# Altium PCB ALio Arduino ver.PcbDoc (part 2 of 2)
Units mm, origin at the board's own origin, x right, y up, seen from the top; angles counter-clockwise.
Board outline 88.22 x 65.31 mm, 2 copper layers (Top Layer, Bottom Layer); 443 components, 0 nets, 3065 pads, 0 vias.
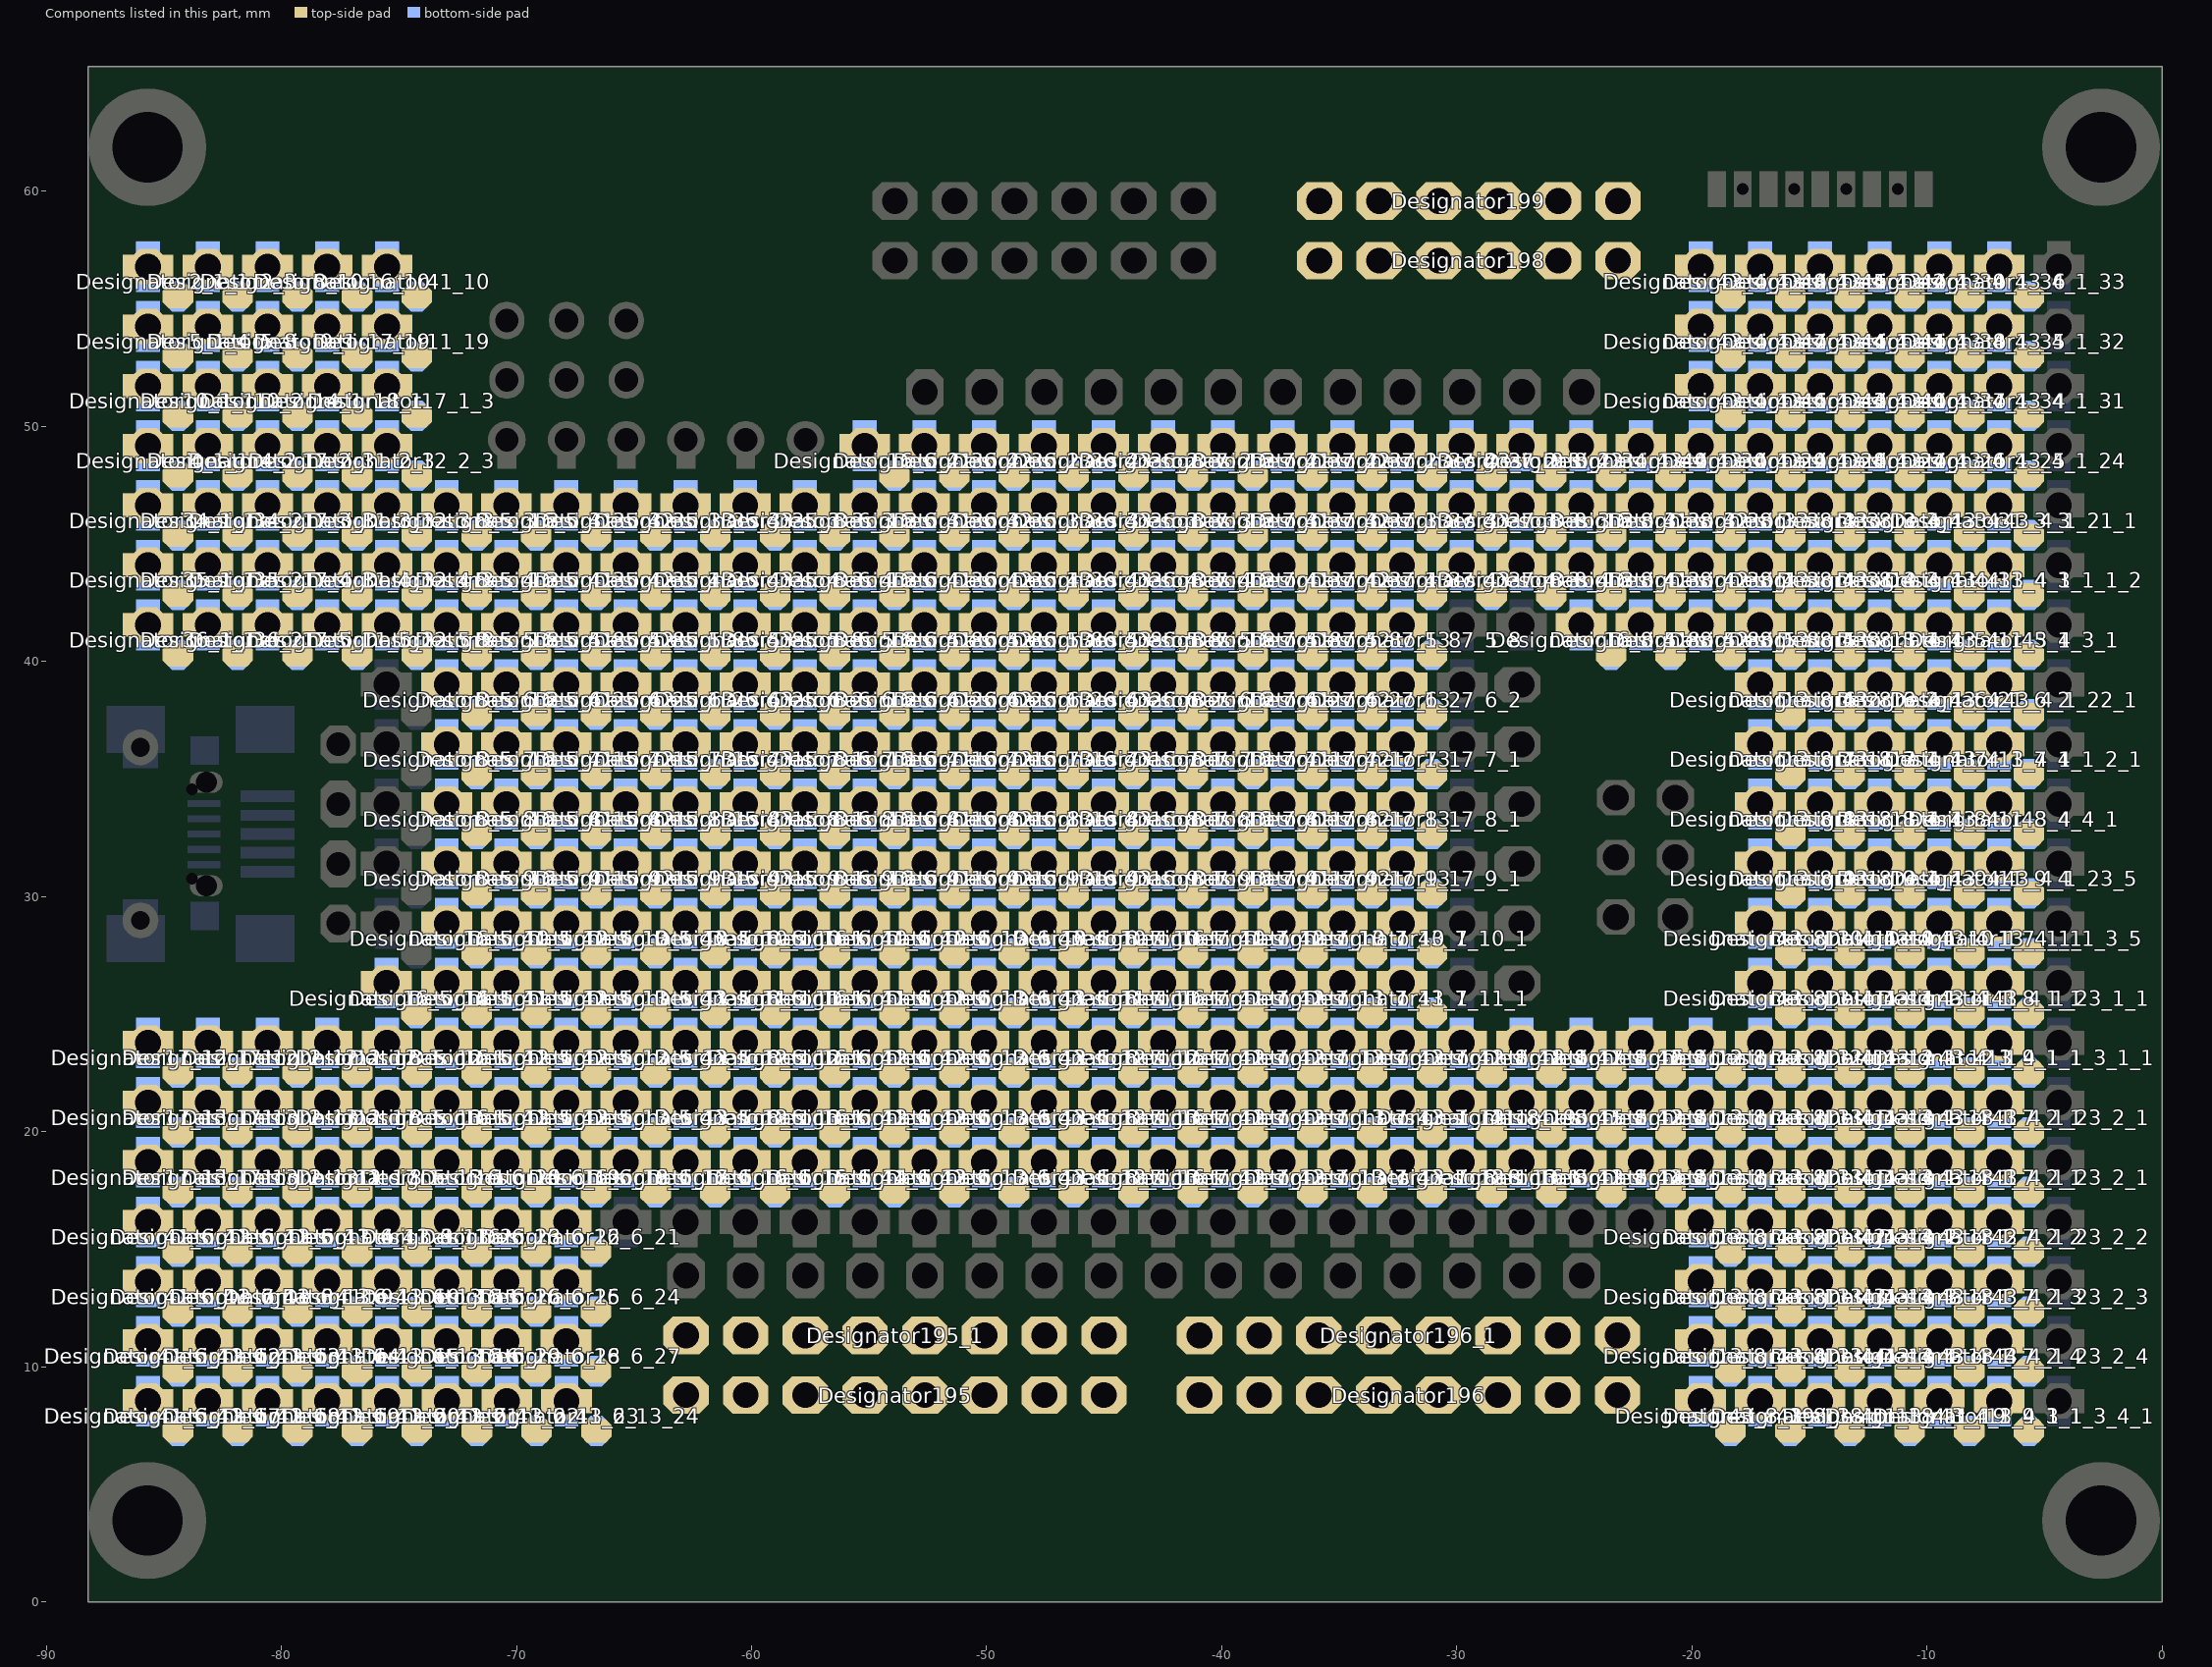
[diagram p2: the components of this part, seen from the top]

## Nets (pads, with @x,y where several pads share a name; then routed paths per layer and width w, separated by ;. In a path a pad name is that pad's centre, name@x,y a point inside that pad or via, vN(x,y) a via of type N, cw(c..) or ccw(c..) an arc to the next point about the centre after c; other vN are vias at no path point)
pads on no net: Designator2_1_1.1 Designator2_1_1.2 Designator2_3.1 Designator2_3.2 Designator4_1_1.1 Designator4_1_1.2 Designator4_2.1 Designator4_2.2 Designator5_1_4.1 Designator5_1_4.2 Designator5_8.1 Designator5_8.2 Designator8_5_3_3.1 Designator8_5_3_3.2 Designator8_5_4_3.1 Designator8_5_4_3.2 Designator8_5_5_8.1 Designator8_5_5_8.2 Designator8_5_6_2.1 Designator8_5_6_2.2 Designator8_5_7_1.1 Designator8_5_7_1.2 Designator8_5_8_1.1 Designator8_5_8_1.2 Designator8_5_9_1.1 Designator8_5_9_1.2 Designator8_5_12_1.1 Designator8_5_12_1.2 Designator8_5_13_1.1 Designator8_5_13_1.2 Designator8_6_3_3.1 Designator8_6_3_3.2 Designator8_6_4_3.1 Designator8_6_4_3.2 Designator8_6_5_8.1 Designator8_6_5_8.2 Designator8_6_6_2.1 Designator8_6_6_2.2 Designator8_6_7_1.1 Designator8_6_7_1.2 Designator8_6_8_1.1 Designator8_6_8_1.2 Designator8_6_9_1.1 Designator8_6_9_1.2 Designator8_6_10_1.1 Designator8_6_10_1.2 Designator8_6_11_1.1 Designator8_6_11_1.2 Designator8_6_12_1.1 Designator8_6_12_1.2 Designator8_6_13_1.1 Designator8_6_13_1.2 Designator8_7_2_3.1 Designator8_7_2_3.2 Designator8_7_3_3.1 Designator8_7_3_3.2 Designator8_7_4_3.1 Designator8_7_4_3.2 Designator8_7_5_8.1 Designator8_7_5_8.2 Designator8_7_6_2.1 Designator8_7_6_2.2 Designator8_7_7_1.1 Designator8_7_7_1.2 Designator8_7_8_1.1 Designator8_7_8_1.2 Designator8_7_9_1.1 Designator8_7_9_1.2 Designator8_7_10_1.1 Designator8_7_10_1.2 Designator8_7_11_1.1 Designator8_7_11_1.2 Designator8_7_12_1.1 Designator8_7_12_1.2 Designator8_7_13_1.1 Designator8_7_13_1.2 Designator8_8_2_3.1 Designator8_8_2_3.2 Designator8_8_3_3.1 Designator8_8_3_3.2 Designator8_8_4_3.1 Designator8_8_4_3.2 Designator8_8_13_1.1 Designator8_8_13_1.2 Designator8_10.1 Designator8_10.2 Designator9_1.1 Designator9_1.2 Designator10_1_1.1 Designator10_1_1.2 Designator10_2.1 Designator10_2.2 Designator11_2_3.1 Designator11_2_3.2 Designator11_3_3.1 Designator11_3_3.2 Designator11_4_3.1 Designator11_4_3.2 Designator11_5_2.1 Designator11_5_2.2 Designator11_12_1.1 Designator11_12_1.2 Designator11_13_1.1 Designator11_13_1.2 Designator11_19.1 Designator11_19.2 Designator12_2_3.1 Designator12_2_3.2 Designator12_3_3.1 Designator12_3_3.2 Designator12_4_3.1 Designator12_4_3.2 Designator12_5_8.1 Designator12_5_8.2 Designator12_12_1.1 Designator12_12_1.2 Designator12_17_1.1 Designator12_17_1.2 Designator13_4_1_1_1_2.1 Designator13_4_1_1_1_2.2 Designator13_4_1_1_2_1.1 Designator13_4_1_1_2_1.2 Designator13_4_1_1_3_1_1.1 Designator13_4_1_1_3_1_1.2 Designator13_4_1_1_3_4_1.1 Designator13_4_1_1_3_4_1.2 Designator13_4_1_1_3_5.1 Designator13_4_1_1_3_5.2 Designator13_4_1_3_3.1 Designator13_4_1_3_3.2 Designator13_4_1_4_3.1 Designator13_4_1_4_3.2 Designator13_4_1_5_1.1 Designator13_4_1_5_1.2 Designator13_4_1_6_2.1 Designator13_4_1_6_2.2 Designator13_4_1_7_1.1 Designator13_4_1_7_1.2 Designator13_4_1_8_1.1 Designator13_4_1_8_1.2 Designator13_4_1_9_1.1 Designator13_4_1_9_1.2 Designator13_4_1_10_1.1 Designator13_4_1_10_1.2 Designator13_4_1_11_1.1 Designator13_4_1_11_1.2 Designator13_4_1_12_1.1 Designator13_4_1_12_1.2 Designator13_4_1_13_1.1 Designator13_4_1_13_1.2 Designator13_4_1_13_2.1 Designator13_4_1_13_2.2 Designator13_4_1_13_3.1 Designator13_4_1_13_3.2 Designator13_4_1_13_4.1 Designator13_4_1_13_4.2 Designator13_4_1_18_1.1 Designator13_4_1_18_1.2 Designator13_4_1_19.1 Designator13_4_1_19.2 Designator13_5_3_3.1 Designator13_5_3_3.2 Designator13_5_4_3.1 Designator13_5_4_3.2 Designator13_5_5_8.1 Designator13_5_5_8.2 Designator13_5_6_2.1 Designator13_5_6_2.2 Designator13_5_7_1.1 Designator13_5_7_1.2 Designator13_5_8_1.1 Designator13_5_8_1.2 Designator13_5_9_1.1 Designator13_5_9_1.2 Designator13_5_10_1.1 Designator13_5_10_1.2 Designator13_5_11_1.1 Designator13_5_11_1.2 Designator13_5_12_1.1 Designator13_5_12_1.2 Designator13_5_13_1.1 Designator13_5_13_1.2 Designator13_6_2_3.1 Designator13_6_2_3.2 Designator13_6_3_3.1 Designator13_6_3_3.2 Designator13_6_4_3.1 Designator13_6_4_3.2 Designator13_6_5_8.1 Designator13_6_5_8.2 Designator13_6_6_2.1 Designator13_6_6_2.2 Designator13_6_7_1.1 Designator13_6_7_1.2 Designator13_6_8_1.1 Designator13_6_8_1.2 Designator13_6_9_1.1 Designator13_6_9_1.2 Designator13_6_10_1.1 Designator13_6_10_1.2 Designator13_6_11_1.1 Designator13_6_11_1.2 Designator13_6_12_1.1 Designator13_6_12_1.2 Designator13_6_13_1.1 Designator13_6_13_1.2 Designator13_7_2_3.1 Designator13_7_2_3.2 Designator13_7_3_3.1 Designator13_7_3_3.2 Designator13_7_4_3.1 Designator13_7_4_3.2 Designator13_7_5_8.1 Designator13_7_5_8.2 Designator13_7_6_2.1 Designator13_7_6_2.2 Designator13_7_7_1.1 Designator13_7_7_1.2 Designator13_7_8_1.1 Designator13_7_8_1.2 Designator13_7_9_1.1 Designator13_7_9_1.2 Designator13_7_10_1.1 Designator13_7_10_1.2 Designator13_7_11_1.1 Designator13_7_11_1.2 Designator13_7_12_1.1 Designator13_7_12_1.2 Designator13_7_13_1.1 Designator13_7_13_1.2 Designator13_8_3_3.1 Designator13_8_3_3.2 Designator13_8_4_3.1 Designator13_8_4_3.2 Designator13_8_5_8.1 Designator13_8_5_8.2 Designator13_8_6_2.1 Designator13_8_6_2.2 Designator13_8_7_1.1 Designator13_8_7_1.2 Designator13_8_8_1.1 Designator13_8_8_1.2 Designator13_8_9_1.1 Designator13_8_9_1.2 Designator13_8_12_1.1 Designator13_8_12_1.2 Designator13_8_13_1.1 Designator13_8_13_1.2 Designator13_8_13_2.1 Designator13_8_13_2.2 Designator13_8_13_3.1 Designator13_8_13_3.2 Designator13_8_13_4.1 Designator13_8_13_4.2 Designator14_1.1 Designator14_1.2 Designator16_5_3_3.1 Designator16_5_3_3.2 Designator16_5_4_3.1 Designator16_5_4_3.2 Designator16_5_5_8.1 Designator16_5_5_8.2 Designator16_5_6_2.1 Designator16_5_6_2.2 Designator16_5_7_1.1 Designator16_5_7_1.2 Designator16_5_8_1.1 Designator16_5_8_1.2 Designator16_5_9_1.1 Designator16_5_9_1.2 Designator16_5_10_1.1 Designator16_5_10_1.2 Designator16_5_11_1.1 Designator16_5_11_1.2 Designator16_5_12_1.1 Designator16_5_12_1.2 Designator16_5_13_1.1 Designator16_5_13_1.2 Designator16_5_14_1.1 Designator16_5_14_1.2 Designator16_6_2_3.1 Designator16_6_2_3.2 Designator16_6_3_3.1 Designator16_6_3_3.2 Designator16_6_4_3.1 Designator16_6_4_3.2 Designator16_6_5_8.1 Designator16_6_5_8.2 Designator16_6_6_2.1 Designator16_6_6_2.2 Designator16_6_7_1.1 Designator16_6_7_1.2 Designator16_6_8_1.1 Designator16_6_8_1.2 Designator16_6_9_1.1 Designator16_6_9_1.2 Designator16_6_10_1.1 Designator16_6_10_1.2 Designator16_6_11_1.1 Designator16_6_11_1.2 Designator16_6_12_1.1 Designator16_6_12_1.2 Designator16_6_13_1.1 Designator16_6_13_1.2 Designator16_6_14_1.1 Designator16_6_14_1.2 Designator16_6_15_1.1 Designator16_6_15_1.2 Designator16_6_16_1.1 Designator16_6_16_1.2 Designator16_6_17_1.1 Designator16_6_17_1.2 Designator16_6_18_1.1 Designator16_6_18_1.2 Designator16_6_19.1 Designator16_6_19.2 Designator16_6_20.1 Designator16_6_20.2 Designator16_6_21.1 Designator16_6_21.2 Designator16_6_22.1 Designator16_6_22.2 Designator16_6_23.1 Designator16_6_23.2 Designator16_6_24.1 Designator16_6_24.2 Designator16_6_25.1 Designator16_6_25.2 Designator16_6_26.1 Designator16_6_26.2 Designator16_6_27.1 Designator16_6_27.2 Designator16_6_28.1 Designator16_6_28.2 Designator16_6_29.1 Designator16_6_29.2 Designator16_7_2_3.1 Designator16_7_2_3.2 Designator16_7_3_3.1 Designator16_7_3_3.2 Designator16_7_4_3.1 Designator16_7_4_3.2 Designator16_7_5_8.1 Designator16_7_5_8.2 Designator16_7_6_2.1 Designator16_7_6_2.2 Designator16_7_7_1.1 Designator16_7_7_1.2 Designator16_7_8_1.1 Designator16_7_8_1.2 Designator16_7_9_1.1 Designator16_7_9_1.2 Designator16_7_10_1.1 Designator16_7_10_1.2 Designator16_7_11_1.1 Designator16_7_11_1.2 Designator16_7_12_1.1 Designator16_7_12_1.2 Designator16_7_13_1.1 Designator16_7_13_1.2 Designator16_8_3_3.1 Designator16_8_3_3.2 Designator16_8_4_3.1 Designator16_8_4_3.2 Designator16_8_5_8.1 Designator16_8_5_8.2 Designator16_8_13_1.1 Designator16_8_13_1.2 Designator16_10.1 Designator16_10.2 Designator17_1_3.1 Designator17_1_3.2 Designator17_2_3.1 Designator17_2_3.2 Designator17_3_3.1 Designator17_3_3.2 Designator17_4_3.1 Designator17_4_3.2 Designator17_5_1.1 Designator17_5_1.2 Designator17_12_1_1.1 Designator17_12_1_1.2 Designator17_12_2.1 Designator17_12_2.2 Designator17_13_1_1.1 Designator17_13_1_1.2 Designator17_13_2.1 Designator17_13_2.2 Designator17_19.1 Designator17_19.2 Designator18_1.1 Designator18_1.2 Designator34_1_1.1 Designator34_1_1.2 Designator34_2.1 Designator34_2.2 Designator35_1_1.1 Designator35_1_1.2 Designator35_2.1 Designator35_2.2 Designator36_1_1.1 Designator36_1_1.2 Designator36_2.1 Designator36_2.2 Designator41_5_3_3.1 Designator41_5_3_3.2 Designator41_5_4_3.1 Designator41_5_4_3.2 Designator41_5_5_8.1 Designator41_5_5_8.2 Designator41_5_6_2.1 Designator41_5_6_2.2 Designator41_5_7_1.1 Designator41_5_7_1.2 Designator41_5_8_1.1 Designator41_5_8_1.2 Designator41_5_9_1.1 Designator41_5_9_1.2 Designator41_5_10_1.1 Designator41_5_10_1.2 Designator41_5_11_1.1 Designator41_5_11_1.2 Designator41_5_12_1.1 Designator41_5_12_1.2 Designator41_5_13_1.1 Designator41_5_13_1.2 Designator41_6_2_3.1 Designator41_6_2_3.2 Designator41_6_3_3.1 Designator41_6_3_3.2 Designator41_6_4_3.1 Designator41_6_4_3.2 Designator41_6_5_8.1 Designator41_6_5_8.2 Designator41_6_6_2.1 Designator41_6_6_2.2 Designator41_6_7_1.1 Designator41_6_7_1.2 Designator41_6_8_1.1 Designator41_6_8_1.2 Designator41_6_9_1.1 Designator41_6_9_1.2 Designator41_6_10_1.1 Designator41_6_10_1.2 Designator41_6_11_1.1 Designator41_6_11_1.2 Designator41_6_12_1.1 Designator41_6_12_1.2 Designator41_6_13_1.1 Designator41_6_13_1.2 Designator41_6_13_2.1 Designator41_6_13_2.2 Designator41_6_13_3.1 Designator41_6_13_3.2 Designator41_6_13_4.1 Designator41_6_13_4.2 Designator41_6_13_5.1 Designator41_6_13_5.2 Designator41_6_13_6.1 Designator41_6_13_6.2 Designator41_6_13_7.1 Designator41_6_13_7.2 Designator41_6_13_8.1 Designator41_6_13_8.2 Designator41_6_13_9.1 Designator41_6_13_9.2 Designator41_6_13_10.1 Designator41_6_13_10.2 Designator41_6_13_11.1 Designator41_6_13_11.2 Designator41_6_13_12.1 Designator41_6_13_12.2 Designator41_6_13_13.1 Designator41_6_13_13.2 Designator41_6_13_14.1 Designator41_6_13_14.2 Designator41_6_13_15.1 Designator41_6_13_15.2 Designator41_6_13_16.1 Designator41_6_13_16.2 Designator41_6_13_17.1 Designator41_6_13_17.2 Designator41_6_13_18.1 Designator41_6_13_18.2 Designator41_6_13_19.1 Designator41_6_13_19.2 Designator41_6_13_20.1 Designator41_6_13_20.2 Designator41_6_13_21.1 Designator41_6_13_21.2 Designator41_6_13_22.1 Designator41_6_13_22.2 Designator41_6_13_23.1 Designator41_6_13_23.2 Designator41_6_13_24.1 Designator41_6_13_24.2 Designator41_7_2_3.1 Designator41_7_2_3.2 Designator41_7_3_3.1 Designator41_7_3_3.2 Designator41_7_4_3.1 Designator41_7_4_3.2 Designator41_7_5_8.1 Designator41_7_5_8.2 Designator41_7_6_2.1 Designator41_7_6_2.2 Designator41_7_7_1.1 Designator41_7_7_1.2 Designator41_7_8_1.1 Designator41_7_8_1.2 Designator41_7_9_1.1 Designator41_7_9_1.2 Designator41_7_10_1.1 Designator41_7_10_1.2 Designator41_7_11_1.1 Designator41_7_11_1.2 Designator41_7_12_1.1 Designator41_7_12_1.2 Designator41_7_13_1.1 Designator41_7_13_1.2 Designator41_8_3_3.1 Designator41_8_3_3.2 Designator41_8_4_3.1 Designator41_8_4_3.2 Designator41_8_5_8.1 Designator41_8_5_8.2 Designator41_8_13_1.1 Designator41_8_13_1.2 Designator41_8_14_1.1 Designator41_8_14_1.2 Designator41_8_15_1.1 Designator41_8_15_1.2 Designator41_8_16_1.1 Designator41_8_16_1.2 Designator41_8_17_1.1 Designator41_8_17_1.2 Designator41_8_18_1.1 Designator41_8_18_1.2 Designator41_8_19.1 Designator41_8_19.2 Designator41_10.1 Designator41_10.2 Designator42_5_3_3.1 Designator42_5_3_3.2 Designator42_5_4_3.1 Designator42_5_4_3.2 Designator42_5_5_8.1 Designator42_5_5_8.2 Designator42_5_6_2.1 Designator42_5_6_2.2 Designator42_5_7_1.1 Designator42_5_7_1.2 Designator42_5_8_1.1 Designator42_5_8_1.2 Designator42_5_9_1.1 Designator42_5_9_1.2 Designator42_5_10_1.1 Designator42_5_10_1.2 Designator42_5_11_1.1 Designator42_5_11_1.2 Designator42_5_12_1.1 Designator42_5_12_1.2 Designator42_5_13_1.1 Designator42_5_13_1.2 Designator42_6_2_3.1 Designator42_6_2_3.2 Designator42_6_3_3.1 Designator42_6_3_3.2 Designator42_6_4_3.1 Designator42_6_4_3.2 Designator42_6_5_8.1 Designator42_6_5_8.2 Designator42_6_6_2.1 Designator42_6_6_2.2 Designator42_6_7_1.1 Designator42_6_7_1.2 Designator42_6_8_1.1 Designator42_6_8_1.2 Designator42_6_9_1.1 Designator42_6_9_1.2 Designator42_6_10_1.1 Designator42_6_10_1.2 Designator42_6_11_1.1 Designator42_6_11_1.2 Designator42_6_12_1.1 Designator42_6_12_1.2 Designator42_6_13_1.1 Designator42_6_13_1.2 Designator42_7_2_3.1 Designator42_7_2_3.2 Designator42_7_3_3.1 Designator42_7_3_3.2 Designator42_7_4_3.1 Designator42_7_4_3.2 Designator42_7_5_8.1 Designator42_7_5_8.2 Designator42_7_6_2.1 Designator42_7_6_2.2 Designator42_7_7_1.1 Designator42_7_7_1.2 Designator42_7_8_1.1 Designator42_7_8_1.2 Designator42_7_9_1.1 Designator42_7_9_1.2 Designator42_7_10_1.1 Designator42_7_10_1.2 Designator42_7_11_1.1 Designator42_7_11_1.2 Designator42_7_12_1.1 Designator42_7_12_1.2 Designator42_7_13_1.1 Designator42_7_13_1.2 Designator42_8_3_3.1 Designator42_8_3_3.2 Designator42_8_4_3.1 Designator42_8_4_3.2 Designator42_8_5_8.1 Designator42_8_5_8.2 Designator42_8_12_1.1 Designator42_8_12_1.2 Designator42_8_13_1.1 Designator42_8_13_1.2 Designator43_4_1_3_3.1 Designator43_4_1_3_3.2 Designator43_4_1_4_3.1 Designator43_4_1_4_3.2 Designator43_4_1_5_1.1 Designator43_4_1_5_1.2 Designator43_4_1_6_2.1 Designator43_4_1_6_2.2 Designator43_4_1_7_1_1.1 Designator43_4_1_7_1_1.2 Designator43_4_1_7_2_1.1 Designator43_4_1_7_2_1.2 Designator43_4_1_7_2_2.1 Designator43_4_1_7_2_2.2 Designator43_4_1_7_2_3.1 Designator43_4_1_7_2_3.2 Designator43_4_1_7_2_4.1 Designator43_4_1_7_2_4.2 Designator43_4_1_7_4.1 Designator43_4_1_7_4.2 Designator43_4_1_8_1_1.1 Designator43_4_1_8_1_1.2 Designator43_4_1_8_4.1 Designator43_4_1_8_4.2 Designator43_4_1_9_1_1.1 Designator43_4_1_9_1_1.2 Designator43_4_1_9_3_1.1 Designator43_4_1_9_3_1.2 Designator43_4_1_9_4.1 Designator43_4_1_9_4.2 Designator43_4_1_10_1.1 Designator43_4_1_10_1.2 Designator43_4_1_11_1.1 Designator43_4_1_11_1.2 Designator43_4_1_12_1.1 Designator43_4_1_12_1.2 Designator43_4_1_13_1.1 Designator43_4_1_13_1.2 Designator43_4_1_13_2.1 Designator43_4_1_13_2.2 Designator43_4_1_13_3.1 Designator43_4_1_13_3.2 Designator43_4_1_13_4.1 Designator43_4_1_13_4.2 Designator43_4_1_21_1.1 Designator43_4_1_21_1.2 Designator43_4_1_22_1.1 Designator43_4_1_22_1.2 Designator43_4_1_23_1_1.1 Designator43_4_1_23_1_1.2 Designator43_4_1_23_2_1.1 Designator43_4_1_23_2_1.2 Designator43_4_1_23_2_2.1 Designator43_4_1_23_2_2.2 Designator43_4_1_23_2_3.1 Designator43_4_1_23_2_3.2 Designator43_4_1_23_2_4.1 Designator43_4_1_23_2_4.2 Designator43_4_1_23_5.1 Designator43_4_1_23_5.2 Designator43_4_1_24.1 Designator43_4_1_24.2 Designator43_4_1_25.1 Designator43_4_1_25.2 Designator43_4_1_26.1 Designator43_4_1_26.2 Designator43_4_1_27.1 Designator43_4_1_27.2 Designator43_4_1_28.1 Designator43_4_1_28.2 Designator43_4_1_29.1 Designator43_4_1_29.2 Designator43_4_1_30.1 Designator43_4_1_30.2 Designator43_4_1_31.1 Designator43_4_1_31.2 Designator43_4_1_32.1 Designator43_4_1_32.2 Designator43_4_1_33.1 Designator43_4_1_33.2 Designator43_4_1_34.1 Designator43_4_1_34.2 Designator43_4_1_35.1 Designator43_4_1_35.2 Designator43_4_1_36.1 Designator43_4_1_36.2 Designator43_4_1_37.1 Designator43_4_1_37.2 Designator43_4_1_38.1 Designator43_4_1_38.2 Designator43_4_1_39.1 Designator43_4_1_39.2 Designator43_4_1_40.1 Designator43_4_1_40.2 Designator43_4_1_41.1 Designator43_4_1_41.2 Designator43_4_1_42.1 Designator43_4_1_42.2 Designator43_4_1_43.1 Designator43_4_1_43.2 Designator43_4_1_44.1 Designator43_4_1_44.2 Designator43_4_1_45.1 Designator43_4_1_45.2 Designator43_4_1_46.1 Designator43_4_1_46.2 Designator43_4_1_47.1 Designator43_4_1_47.2 Designator43_4_1_48.1 Designator43_4_1_48.2 Designator43_4_1_49.1 Designator43_4_1_49.2 Designator43_4_3_1.1 Designator43_4_3_1.2 Designator43_4_4_1.1 Designator43_4_4_1.2 Designator43_5_3_3.1 Designator43_5_3_3.2 Designator43_5_4_3.1 Designator43_5_4_3.2 Designator43_5_5_8.1 Designator43_5_5_8.2 Designator43_5_6_2.1 Designator43_5_6_2.2 Designator43_5_7_1.1 Designator43_5_7_1.2 Designator43_5_8_1.1 Designator43_5_8_1.2 Designator43_5_9_1.1 Designator43_5_9_1.2 Designator43_5_10_1.1 Designator43_5_10_1.2 Designator43_5_11_1.1 Designator43_5_11_1.2 Designator43_5_12_1.1 Designator43_5_12_1.2 Designator43_5_13_1.1 Designator43_5_13_1.2 Designator43_6_2_3.1 Designator43_6_2_3.2 Designator43_6_3_3.1 Designator43_6_3_3.2 Designator43_6_4_3.1 Designator43_6_4_3.2 Designator43_6_5_8.1 Designator43_6_5_8.2 Designator43_6_6_2.1 Designator43_6_6_2.2 Designator43_6_7_1.1 Designator43_6_7_1.2 Designator43_6_8_1.1 Designator43_6_8_1.2 Designator43_6_9_1.1 Designator43_6_9_1.2 Designator43_6_10_1.1 Designator43_6_10_1.2 Designator43_6_11_1.1 Designator43_6_11_1.2 Designator43_6_12_1.1 Designator43_6_12_1.2 Designator43_6_13_1.1 Designator43_6_13_1.2 Designator43_7_2_3.1 Designator43_7_2_3.2 Designator43_7_3_3.1 Designator43_7_3_3.2 Designator43_7_4_3.1 Designator43_7_4_3.2 Designator43_7_10_1.1 Designator43_7_10_1.2 Designator43_7_11_1.1 Designator43_7_11_1.2 Designator43_7_12_1.1 Designator43_7_12_1.2 Designator43_7_13_1.1 Designator43_7_13_1.2 Designator43_8_3_3.1 Designator43_8_3_3.2 Designator43_8_4_3.1 Designator43_8_4_3.2 Designator43_8_5_1.1 Designator43_8_5_1.2 Designator43_8_6_2.1 Designator43_8_6_2.2 Designator43_8_7_1.1 Designator43_8_7_1.2 Designator43_8_8_1.1 Designator43_8_8_1.2 Designator43_8_9_1.1 Designator43_8_9_1.2 Designator43_8_10_1.1 Designator43_8_10_1.2 Designator43_8_11_1.1 Designator43_8_11_1.2 Designator43_8_12_1.1 Designator43_8_12_1.2 Designator43_8_13_1.1 Designator43_8_13_1.2 Designator43_8_13_2.1 Designator43_8_13_2.2 Designator43_8_13_3.1 Designator43_8_13_3.2 Designator43_8_13_4.1 Designator43_8_13_4.2 Designator43_8_18_1.1 Designator43_8_18_1.2 Designator43_8_19.1 Designator43_8_19.2 Designator195.1 Designator195.2 Designator195.3 Designator195.4 Designator195.5 Designator195.6 Designator195.7 Designator195.8 Designator195_1.1 Designator195_1.2 Designator195_1.3 Designator195_1.4 Designator195_1.5 Designator195_1.6 Designator195_1.7 Designator195_1.8 Designator196.1 Designator196.2 Designator196.3 Designator196.4 Designator196.5 Designator196.6 Designator196.7 Designator196.8 Designator196_1.1 Designator196_1.2 Designator196_1.3 Designator196_1.4 Designator196_1.5 Designator196_1.6 Designator196_1.7 Designator196_1.8 Designator198.1 Designator198.2 Designator198.3 Designator198.4 Designator198.5 Designator198.6 Designator199.1 Designator199.2 Designator199.3 Designator199.4 Designator199.5 Designator199.6
copper on no net: | length 362.7
  Top Layer w0.254: -19.632,56.8 -19.632,59.431 -18.964,60.1 ; -17.092,56.8 -16.764,57.129 -16.764,60.1 ; -14.552,56.8 -14.552,60.089 ; -14.546,60.1 -14.535,60.089 ; -12.364,57.151 -12.012,56.8 ; -12.341,57.129 -12.341,60.1 ; -10.141,60.1 -9.472,59.431 -9.472,56.8
  Top Layer w0.33: -70.413,49.435 -71.607,50.63 -71.607,53.321 -70.413,54.515 ; -70.413,51.975 -70.413,51.485 -68.452,49.524 -67.962,49.524 -67.873,49.435 ; -67.873,51.975 -67.178,51.975 -65.883,50.68 -64.038,50.68 -62.793,49.435 ; -67.873,54.515 -69.157,53.23 -69.157,51.43 -68.458,50.73 -67.182,50.73 -65.887,49.435 -65.333,49.435 ; -65.333,51.975 -62.793,51.975 -60.253,49.435 ; -65.333,54.515 -62.793,54.515 -57.713,49.435 ; -24.997,32.94 -21.975,32.94
  Top Layer w0.356: -21.975,32.94 -20.705,31.67
  Top Layer w0.381: -75.713,27.59 -74.692,27.59 ; -75.713,30.13 -74.692,30.13 ; -75.713,32.67 -74.692,32.67 ; -75.713,35.21 -74.692,35.21 ; -75.713,37.75 -74.692,37.75 ; -27.49,36.478 -25.513,36.478 -23.245,34.21 ; -27.403,39.018 -23.404,39.018 -21.543,37.157 -20.705,36.318 -20.705,34.21 ; -27.252,26.318 -22.134,26.318 -20.705,27.748 -20.705,29.13 ; -27.252,28.858 -23.517,28.858 -23.245,29.13 ; -27.252,31.398 -25.458,31.398 -23.517,31.398 -23.245,31.67 ; -27.252,33.938 -25.995,33.938 -24.997,32.94
  Top Layer w0.635: -53.903,57.055 -52.633,55.785 -52.633,51.465 ; -51.363,57.055 -50.093,55.785 -50.093,51.465 ; -48.823,57.055 -47.553,55.785 -47.553,51.465 ; -42.473,13.875 -42.473,12.859 -40.949,11.335 ; -39.933,13.875 -39.933,12.859 -38.409,11.335 ; -37.393,13.875 -37.393,12.859 -35.869,11.335 ; -34.853,13.875 -34.853,12.859 -33.329,11.335 ; -34.853,51.465 -34.853,55.507 -33.305,57.055 ; -32.313,13.875 -32.313,12.859 -30.789,11.335 ; -32.313,51.465 -32.313,55.507 -30.765,57.055 ; -29.773,13.875 -29.773,12.859 -28.249,11.335 ; -29.773,51.465 -29.773,55.507 -28.225,57.055 ; -27.233,13.875 -27.233,12.859 -25.709,11.335 ; -27.233,51.465 -27.233,55.507 -25.685,57.055 ; -24.693,13.875 -24.693,12.859 -23.169,11.335 ; -24.693,51.465 -24.693,55.507 -23.145,57.055
  Top Layer w0.762: -62.793,8.795 -62.793,13.875 ; -60.253,8.795 -60.253,13.875 ; -57.713,8.795 -57.713,13.875 ; -55.173,8.795 -55.173,13.875 ; -53.903,57.055 -53.903,59.595 ; -52.633,8.795 -52.633,13.875 ; -51.363,57.055 -51.363,59.595 ; -50.093,8.795 -50.093,13.875 ; -48.823,57.055 -48.823,59.595 ; -47.553,8.795 -47.553,13.875 ; -46.283,59.595 -46.283,57.055 -45.013,55.785 -45.013,51.465 ; -45.013,8.795 -45.013,13.875 ; -43.743,59.595 -43.743,57.055 -42.473,55.785 -42.473,51.465 ; -41.203,59.595 -41.203,57.055 -39.933,55.785 -39.933,51.465 ; -40.949,8.795 -40.949,11.335 ; -38.409,8.795 -38.409,11.335 ; -37.393,51.465 -37.393,55.507 -35.845,57.055 -35.845,59.595 ; -35.869,8.795 -35.869,11.335 ; -33.329,8.795 -33.329,11.335 ; -33.305,57.055 -33.305,59.595 ; -30.789,8.795 -30.789,11.335 ; -30.765,57.055 -30.765,59.595 ; -28.249,8.795 -28.249,11.335 ; -28.225,57.055 -28.225,59.595 ; -25.709,8.795 -25.709,11.335 ; -25.685,57.055 -25.685,59.595 ; -23.169,8.795 -23.169,11.335 ; -23.145,57.055 -23.145,59.595
  Bottom Layer w0.254: -83.301,31.36 -82.366,31.36 -82.063,31.057 -80.6,31.057 ; -83.301,32.01 -82.195,32.01 -82.074,31.889 -80.631,31.889 ; -83.301,32.66 -80.608,32.66 ; -83.301,33.31 -82.195,33.31 -82.074,33.431 -80.631,33.431 -80.6,33.463 ; -83.301,33.96 -82.366,33.96 -82.063,34.263 -80.6,34.263 -79.794,34.263 -77.578,36.478 ; -80.6,31.063 -79.783,31.063 -77.578,28.858 ; -80.6,31.863 -78.043,31.863 -77.578,31.398 ; -80.6,32.663 -78.854,32.663 -77.578,33.938 ; -19.632,56.8 -19.632,59.431 -18.964,60.1 ; -18.362,55.53 -18.362,58.07 -17.841,58.591 -17.841,60.1 ; -17.092,56.8 -16.741,57.151 ; -16.764,57.129 -16.764,60.1 ; -15.822,55.53 -15.822,58.07 -15.641,58.251 -15.641,60.1 ; -14.552,56.8 -14.552,60.089 ; -14.546,60.089 -14.535,60.1 ; -13.441,60.1 -13.441,58.229 -13.282,58.07 -13.282,55.53 ; -12.341,60.1 -12.341,57.129 -12.012,56.8 ; -11.241,60.1 -11.241,58.569 -10.742,58.07 -10.742,55.53 ; -10.141,60.1 -9.472,59.431 -9.472,56.8 ; -80.608,32.66 -80.6,32.668 -80.608,32.66
  Bottom Layer w0.381: -74.265,28.017 -74.265,29.038 ; -74.265,30.557 -74.265,31.578 ; -74.265,33.097 -74.265,34.118 ; -74.265,35.637 -74.265,36.658 ; -74.265,38.177 -74.265,39.198

## Polygon pours and split planes (outlines as drawn)
no net on Top Solder "Bottom Solder-No Net" (solid): -45.42,4.203 -41.338,4.203 cw(c-41.338,3.857) -40.991,3.857 -40.991,1.066 cw(c-41.269,1.066) -41.269,0.789 -45.434,0.789 cw(c-45.434,1.097) -45.743,1.097 -45.743,3.879 cw(c-45.419,3.879) -45.419,4.203
no net on Bottom Solder "Bottom Solder-No Net" (solid): -35.214,4.203 -39.296,4.203 ccw(c-39.296,3.857) -39.643,3.857 -39.643,1.066 ccw(c-39.365,1.066) -39.365,0.789 -35.2,0.789 ccw(c-35.2,1.097) -34.891,1.097 -34.891,3.879 ccw(c-35.215,3.879) -35.215,4.203
no net on Bottom Solder "Bottom Layer-GND" (solid): -22.5,55.675 -23.775,55.675 -23.775,54.625
no net on Bottom Solder "Bottom Layer-GND" (solid): -25.04,55.675 -26.315,55.675 -26.315,54.625
no net on Bottom Solder "Bottom Layer-GND" (solid): -27.58,55.675 -28.855,55.675 -28.855,54.625
no net on Bottom Solder "Bottom Layer-GND" (solid): -30.12,55.675 -31.395,55.675 -31.395,54.625
no net on Bottom Solder "Bottom Layer-GND" (solid): -32.66,55.675 -33.935,55.675 -33.935,54.625
no net on Bottom Solder "Bottom Layer-GND" (solid): -35.2,55.675 -36.475,55.675 -36.475,54.625
no net on Bottom Solder "Bottom Layer-GND" (solid): -43.275,52.025 -43.275,50.9 -44.2,50.9 -44.2,52.025
no net on Bottom Solder "Bottom Layer-GND" (solid): -46.905,52.555 -48.18,52.555 -48.18,53.605
no net on Bottom Solder "Bottom Layer-GND" (solid): -43.105,52.555 -44.38,52.555 -44.38,53.605
no net on Bottom Solder "Bottom Layer-GND" (solid): -39.285,52.555 -40.56,52.555 -40.56,53.605

## Keep-outs
Keep-Out Layer:
  the board outline again, w0.127

## Other copper
Top Layer:
  rectangle: -75.91,27.4 -75.713,27.62
  rectangle: -75.91,27.56 -75.713,27.781
  rectangle: -75.91,29.94 -75.713,30.16
  rectangle: -75.91,30.1 -75.713,30.321
  rectangle: -75.91,32.48 -75.713,32.7
  rectangle: -75.91,32.64 -75.713,32.861
  rectangle: -75.91,35.02 -75.713,35.24
  rectangle: -75.91,35.18 -75.713,35.401
  rectangle: -75.91,37.56 -75.713,37.78
  rectangle: -75.91,37.72 -75.713,37.941
  region: -20.63,61.776 -21.175,61.776 -21.175,59.198 -20.63,59.198
  region: -7.93,61.776 -8.475,61.776 -8.475,59.198 -7.93,59.198
  region: 531 vertices and 0 holes, not listed, extent -45.503,1.511 -44.177,3.829
  region: 507 vertices and 1 holes, not listed, extent -40.653,2.208 -39.22,3.775
  region: 292 vertices and 1 holes, not listed, extent -39.072,2.208 -37.693,3.775
  region: 527 vertices and 1 holes, not listed, extent -37.907,2.221 -36.527,3.775
  region: 526 vertices and 1 holes, not listed, extent -36.393,2.208 -34.919,3.775
  region: 791 vertices and 0 holes, not listed, extent -45.181,1.096 -41.229,3.882
  region: 565 vertices and 1 holes, not listed, extent -45.731,0.801 -41.002,4.191
  text "Arduino Shield.Ver" at -81.046,60.481 h5.08
  text "T" at -2.831,57.373 h2.26 r270
  text "S" at -2.807,54.836 h2.26 r270
  text "R" at -2.831,52.358 h2.26 r270
  text "Q" at -2.721,49.886 h2.26 r270
  text "P" at -2.831,47.193 h2.26 r270
  text "O" at -1.357,43.407 h2.26 r90
  text "N" at -2.831,42.131 h2.26 r270
  text "M" at -2.831,39.712 h2.26 r270
  text "L" at -2.831,36.932 h2.26 r270
  text "G" at -79.102,35.827 h2.4 r90
  text "K" at -2.831,34.539 h2.26 r270
  text "D+" at -79.079,32.784 h2.4 r90
  text "J" at -2.807,31.804 h2.26 r270
  text "D-" at -79.079,30.441 h2.4 r90
  text "I" at -2.831,28.956 h2.26 r270
  text "V" at -79.079,28.215 h2.4 r90
  text "H" at -2.831,26.887 h2.26 r270
  text "G" at -2.807,24.45 h2.26 r270
  text "F" at -2.831,21.729 h2.26 r270
  text "E" at -2.831,19.241 h2.26 r270
  text "D" at -2.831,16.758 h2.26 r270
  text "C" at -2.807,14.26 h2.26 r270
  text "B" at -2.831,11.627 h2.26 r270
  text "A" at -2.831,9.217 h2.26 r270
  text "32" at -83.765,6.69 h2 r270
  text "31" at -81.225,6.69 h2 r270
  text "30" at -78.685,6.69 h2 r270
  text "29" at -76.145,6.69 h2 r270
  text "28" at -73.589,6.69 h2 r270
  text "27" at -71.059,6.69 h2 r270
  text "26" at -68.509,6.69 h2 r270
  text "7" at -20.265,6.69 h2 r270
  text "6" at -17.725,6.69 h2 r270
  text "5" at -15.172,6.69 h2 r270
  text "4" at -12.652,6.69 h2 r270
  text "3" at -10.105,6.69 h2 r270
  text "2" at -7.576,6.69 h2 r270
  text "1" at -5.074,6.69 h2 r270
  text "More info at CrowdSupply.com" at -79.713,1.853 h2.54
  text "ALio Proto Board" at -29.515,1.641 h2.54
Bottom Layer:
  rectangle: -86.751,31.409 -85.251,33.909
  region: -74.456,29.235 -74.456,29.038 -74.235,29.038 -74.235,29.235
  region: -74.295,29.235 -74.295,29.038 -74.075,29.038 -74.075,29.235
  region: -74.456,31.775 -74.456,31.578 -74.235,31.578 -74.235,31.775
  region: -74.295,31.775 -74.295,31.578 -74.075,31.578 -74.075,31.775
  region: -74.456,34.315 -74.456,34.118 -74.235,34.118 -74.235,34.315
  region: -74.295,34.315 -74.295,34.118 -74.075,34.118 -74.075,34.315
  region: -74.456,36.855 -74.456,36.658 -74.235,36.658 -74.235,36.855
  region: -74.295,36.855 -74.295,36.658 -74.075,36.658 -74.075,36.855
  region: -74.456,39.395 -74.456,39.198 -74.235,39.198 -74.235,39.395
  region: -74.295,39.395 -74.295,39.198 -74.075,39.198 -74.075,39.395
  region: -57.312,47.931 -57.312,48.396 -58.112,48.396 -58.112,47.931
  region: -59.852,47.931 -59.852,48.396 -60.652,48.396 -60.652,47.931
  region: -62.392,47.931 -62.392,48.396 -63.192,48.396 -63.192,47.931
  region: -64.932,47.931 -64.932,48.396 -65.732,48.396 -65.732,47.931
  region: -67.472,47.931 -67.472,48.396 -68.272,48.396 -68.272,47.931
  region: -70.012,47.931 -70.012,48.396 -70.812,48.396 -70.812,47.931
  rectangle: -21.175,59.198 -20.63,61.776
  rectangle: -8.475,59.198 -7.93,61.776
  region: 565 vertices and 1 holes, not listed, extent -39.629,0.801 -34.9,4.191
  region: 791 vertices and 0 holes, not listed, extent -39.401,1.096 -35.449,3.882
  region: 526 vertices and 1 holes, not listed, extent -45.711,2.208 -44.238,3.775
  region: 527 vertices and 1 holes, not listed, extent -44.104,2.221 -42.724,3.775
  region: 292 vertices and 1 holes, not listed, extent -42.938,2.208 -41.558,3.775
  region: 507 vertices and 1 holes, not listed, extent -41.411,2.208 -39.977,3.775
  region: 531 vertices and 0 holes, not listed, extent -36.454,1.511 -35.128,3.829
  text "T" at -2.831,56.227 h2.26 r270
  text "S" at -2.807,53.684 h2.26 r270
  text "R" at -2.831,51.082 h2.26 r270
  text "Q" at -2.721,48.474 h2.26 r270
  text "P" at -2.831,46.087 h2.26 r270
  text "O" at -2.807,43.407 h2.26 r270
  text "N" at -2.831,40.989 h2.26 r270
  text "M" at -2.831,38.328 h2.26 r270
  text "L" at -2.831,36.028 h2.26 r270
  text "K" at -2.831,33.341 h2.26 r270
  text "J" at -2.807,30.996 h2.26 r270
  text "I" at -2.831,28.764 h2.26 r270
  text "H" at -2.831,25.753 h2.26 r270
  text "G" at -2.807,23.11 h2.26 r270
  text "F" at -2.831,20.751 h2.26 r270
  text "E" at -2.831,18.159 h2.26 r270
  text "D" at -2.831,15.562 h2.26 r270
  text "C" at -2.807,12.98 h2.26 r270
  text "B" at -2.831,10.533 h2.26 r270
  text "A" at -2.831,7.863 h2.26 r270
  text "31" at -81.225,4.94 h2 r270
  text "30" at -78.685,4.94 h2 r270
  text "29" at -76.145,4.94 h2 r270
  text "28" at -73.589,4.94 h2 r270
  text "27" at -71.059,4.94 h2 r270
  text "26" at -68.509,4.94 h2 r270
  text "7" at -20.265,4.94 h2 r270
  text "6" at -17.725,4.94 h2 r270
  text "5" at -15.173,4.94 h2 r270
  text "4" at -12.652,4.94 h2 r270
  text "3" at -10.105,4.94 h2 r270
  text "2" at -7.576,4.932 h2 r270

## Silkscreen, mask and mechanical layers (free items; w line width, h text height)
Bottom Overlay:
  drawing of 187 lines, arcs and shapes, not listed
  text "Arduino Shield.Ver" at -56.66,60.481 h5.08
  text "T" at -2.831,56.227 h2.26 r270
  text "0" at -36.758,54.396 h1.27 r90
  text "2" at -31.678,54.396 h1.27 r90
  text "3" at -29.138,54.396 h1.27 r90
  text "4" at -26.598,54.396 h1.27 r90
  text "5" at -24.058,54.396 h1.27 r90
  text "1" at -34.218,53.973 h1.27 r90
  text "2" at -63.097,53.927 h1.27
  text "5V" at -47.765,53.875 h1.27
  text "GND" at -43.32,53.875 h1.27
  text "Vin" at -39.625,53.875 h1.27
  text "S" at -2.807,53.684 h2.26 r270
  text "RST" at -53.379,53.006 h0.89 r315
  text "3V3" at -50.839,53.006 h0.89 r315
  text "1" at -63.521,51.387 h1.27
  text "R" at -2.831,51.082 h2.26 r270
  text "S" at -62.369,50.925 h1.27
  text "Mi" at -59.406,50.925 h1.27
  text "V" at -57.289,50.925 h1.27
  text "Mo" at -64.703,50.31 h0.76
  text "R" at -67.624,50.285 h0.76
  text "G" at -71.902,48.8 h1.27
  text "Q" at -2.721,48.474 h2.26 r270
  text "P" at -2.831,46.087 h2.26 r270
  text "O" at -2.807,43.407 h2.26 r270
  text "N" at -2.831,40.989 h2.26 r270
  text "G" at -77.1,39.225 h2.4 r90
  text "M" at -2.831,38.328 h2.26 r270
  text "G" at -26.22,38.256 h2.26 r270
  text "5" at -23.762,36.336 h1.27 r270
  text "6" at -21.212,36.336 h1.27 r270
  text "L" at -2.831,36.028 h2.26 r270
  text "R" at -26.22,35.748 h2.26 r270
  text "K" at -2.831,33.341 h2.26 r270
  text "Mo" at -26.207,32.552 h2.26 r270
  text "J" at -2.807,30.996 h2.26 r270
  text "S" at -26.22,30.73 h2.26 r270
  text "I" at -2.831,28.764 h2.26 r270
  text "Mi" at -26.22,27.841 h2.26 r270
  text "V" at -77.1,27.53 h2.4 r90
  text "1" at -23.762,26.496 h1.27 r270
  text "2" at -21.212,25.986 h1.27 r270
  text "H" at -2.831,25.753 h2.26 r270
  text "V" at -26.22,25.565 h2.26 r270
  text "G" at -2.807,23.11 h2.26 r270
  text "F" at -2.831,20.751 h2.26 r270
  text "E" at -2.831,18.159 h2.26 r270
  text "D" at -2.831,15.562 h2.26 r270
  text "C" at -2.807,12.98 h2.26 r270
  text "B" at -2.831,10.533 h2.26 r270
  text "A" at -2.831,7.863 h2.26 r270
  text "13" at -57.023,6.244 h1.27 r90
  text "12" at -54.483,6.244 h1.27 r90
  text "11" at -51.943,6.244 h1.27 r90
  text "10" at -49.403,6.244 h1.27 r90
  text "9" at -46.863,6.244 h1.27 r90
  text "8" at -44.323,6.244 h1.27 r90
  text "7" at -40.259,6.244 h1.27 r90
  text "6" at -37.719,6.244 h1.27 r90
  text "5" at -35.179,6.244 h1.27 r90
  text "4" at -32.639,6.244 h1.27 r90
  text "3" at -30.099,6.244 h1.27 r90
  text "2" at -27.559,6.244 h1.27 r90
  text "1" at -25.019,6.244 h1.27 r90
  text "0" at -22.479,6.244 h1.27 r90
  text "1" at -5.061,5.922 h2 r270
  text "32" at -83.765,4.94 h2 r270
  text "31" at -81.225,4.94 h2 r270
  text "30" at -78.685,4.94 h2 r270
  text "29" at -76.145,4.94 h2 r270
  text "28" at -73.589,4.94 h2 r270
  text "27" at -71.059,4.94 h2 r270
  text "26" at -68.509,4.94 h2 r270
  text "7" at -20.265,4.94 h2 r270
  text "6" at -17.725,4.94 h2 r270
  text "5" at -15.173,4.94 h2 r270
  text "4" at -12.652,4.94 h2 r270
  text "3" at -10.105,4.94 h2 r270
  text "2" at -7.576,4.932 h2 r270
  text "GND" at -59.729,4.496 h0.89 r315
  text "AREF" at -61.955,4.182 h0.89 r315
  text "More info at CrowdSupply.com" at -48.936,1.853 h2.54
  text "ALio Proto Board" at -12.363,1.641 h2.54
Top Paste:
  rectangle: -75.91,27.56 -75.713,27.781
  rectangle: -75.91,27.4 -75.713,27.62
  rectangle: -75.91,30.1 -75.713,30.321
  rectangle: -75.91,29.94 -75.713,30.16
  rectangle: -75.91,32.64 -75.713,32.861
  rectangle: -75.91,32.48 -75.713,32.7
  rectangle: -75.91,35.18 -75.713,35.401
  rectangle: -75.91,35.02 -75.713,35.24
  rectangle: -75.91,37.72 -75.713,37.941
  rectangle: -75.91,37.56 -75.713,37.78
  lines w0.381: -75.713,27.59 -74.692,27.59 ; -75.713,30.13 -74.692,30.13 ; -75.713,32.67 -74.692,32.67 ; -75.713,35.21 -74.692,35.21 ; -75.713,37.75 -74.692,37.75 ; -74.265,28.017 -74.265,29.038 ; -74.265,30.557 -74.265,31.578 ; -74.265,33.097 -74.265,34.118 ; -74.265,35.637 -74.265,36.658 ; -74.265,38.177 -74.265,39.198
Bottom Paste:
  rectangle: -86.751,31.409 -85.251,33.909
  region: -74.295,29.235 -74.295,29.038 -74.075,29.038 -74.075,29.235
  region: -74.456,29.235 -74.456,29.038 -74.235,29.038 -74.235,29.235
  region: -74.295,31.775 -74.295,31.578 -74.075,31.578 -74.075,31.775
  region: -74.456,31.775 -74.456,31.578 -74.235,31.578 -74.235,31.775
  region: -74.295,34.315 -74.295,34.118 -74.075,34.118 -74.075,34.315
  region: -74.456,34.315 -74.456,34.118 -74.235,34.118 -74.235,34.315
  region: -74.295,36.855 -74.295,36.658 -74.075,36.658 -74.075,36.855
  region: -74.456,36.855 -74.456,36.658 -74.235,36.658 -74.235,36.855
  region: -74.295,39.395 -74.295,39.198 -74.075,39.198 -74.075,39.395
  region: -74.456,39.395 -74.456,39.198 -74.235,39.198 -74.235,39.395
  lines w0.381: -74.265,28.017 -74.265,29.038 ; -74.265,30.557 -74.265,31.578 ; -74.265,33.097 -74.265,34.118 ; -74.265,35.637 -74.265,36.658 ; -74.265,38.177 -74.265,39.198
Top Solder:
  rectangle: -75.91,27.56 -75.713,27.781
  rectangle: -75.91,27.4 -75.713,27.62
  rectangle: -75.91,30.1 -75.713,30.321
  rectangle: -75.91,29.94 -75.713,30.16
  rectangle: -75.91,32.64 -75.713,32.861
  rectangle: -75.91,32.48 -75.713,32.7
  rectangle: -75.91,35.18 -75.713,35.401
  rectangle: -75.91,35.02 -75.713,35.24
  rectangle: -75.91,37.72 -75.713,37.941
  rectangle: -75.91,37.56 -75.713,37.78
  rectangle: -77.203,27.955 -76.123,37.38
  rectangle: -86.291,47.273 -73.972,57.433
  rectangle: -18.275,7.014 -3.741,40.35
  rectangle: -20.759,40.288 -3.741,57.56
  rectangle: -86.291,7.014 -66.225,24.413
  rectangle: -76.385,15.396 -29.15,40.38
  region: -20.759,47.273 -86.291,47.273 -86.291,40.034 -20.759,40.034
  rectangle: -5.011,9.173 -3.741,18.317
  rectangle: -55.938,47.146 -20.759,49.813
  rectangle: -30.03,15.395 -16.975,24.413
  rectangle: -20.247,7.014 -17.27,15.57
  region: -7.953,61.776 -8.497,61.776 -8.497,59.198 -7.953,59.198
  region: -20.653,61.776 -21.197,61.776 -21.197,59.198 -20.653,59.198
  lines w0.381: -75.713,27.59 -74.692,27.59 ; -75.713,30.13 -74.692,30.13 ; -75.713,32.67 -74.692,32.67 ; -75.713,35.21 -74.692,35.21 ; -75.713,37.75 -74.692,37.75
  text "Arduino Shield.Ver" at -81.046,60.481 h5.08
  text "T" at -2.831,57.373 h2.26 r270
  text "S" at -2.807,54.836 h2.26 r270
  text "R" at -2.831,52.358 h2.26 r270
  text "Q" at -2.721,49.886 h2.26 r270
  text "P" at -2.831,47.193 h2.26 r270
  text "O" at -2.807,44.793 h2.26 r270
  text "N" at -2.831,42.131 h2.26 r270
  text "M" at -2.831,39.712 h2.26 r270
  text "L" at -2.831,36.932 h2.26 r270
  text "G" at -79.102,35.827 h2.4 r90
  text "K" at -2.831,34.539 h2.26 r270
  text "D+" at -79.079,32.784 h2.4 r90
  text "J" at -2.807,31.804 h2.26 r270
  text "D-" at -79.079,30.441 h2.4 r90
  text "I" at -2.831,28.956 h2.26 r270
  text "V" at -79.079,28.215 h2.4 r90
  text "H" at -2.831,26.887 h2.26 r270
  text "G" at -2.807,24.45 h2.26 r270
  text "F" at -2.831,21.729 h2.26 r270
  text "E" at -2.831,19.241 h2.26 r270
  text "D" at -2.831,16.758 h2.26 r270
  text "C" at -2.807,14.26 h2.26 r270
  text "B" at -2.831,11.627 h2.26 r270
  text "A" at -2.831,9.217 h2.26 r270
  text "32" at -83.765,6.69 h2 r270
  text "31" at -81.225,6.69 h2 r270
  text "30" at -78.685,6.69 h2 r270
  text "29" at -76.145,6.69 h2 r270
  text "28" at -73.589,6.69 h2 r270
  text "27" at -71.059,6.69 h2 r270
  text "26" at -68.509,6.69 h2 r270
  text "7" at -20.265,6.69 h2 r270
  text "6" at -17.725,6.69 h2 r270
  text "5" at -15.172,6.69 h2 r270
  text "4" at -12.652,6.69 h2 r270
  text "3" at -10.105,6.69 h2 r270
  text "2" at -7.576,6.69 h2 r270
  text "1" at -5.074,6.69 h2 r270
  text "More info at CrowdSupply.com" at -79.713,1.853 h2.54
  text "ALio Proto Board" at -29.515,1.641 h2.54
Bottom Solder:
  rectangle: -86.851,31.309 -85.151,34.009
  region: -74.295,29.235 -74.295,29.038 -74.075,29.038 -74.075,29.235
  region: -74.456,29.235 -74.456,29.038 -74.235,29.038 -74.235,29.235
  region: -74.295,31.775 -74.295,31.578 -74.075,31.578 -74.075,31.775
  region: -74.456,31.775 -74.456,31.578 -74.235,31.578 -74.235,31.775
  region: -74.295,34.315 -74.295,34.118 -74.075,34.118 -74.075,34.315
  region: -74.456,34.315 -74.456,34.118 -74.235,34.118 -74.235,34.315
  region: -74.295,36.855 -74.295,36.658 -74.075,36.658 -74.075,36.855
  region: -74.456,36.855 -74.456,36.658 -74.235,36.658 -74.235,36.855
  region: -74.295,39.395 -74.295,39.198 -74.075,39.198 -74.075,39.395
  region: -74.456,39.395 -74.456,39.198 -74.235,39.198 -74.235,39.395
  rectangle: -77.203,27.955 -76.123,37.38
  rectangle: -74.212,7.014 -66.225,9.808
  rectangle: -20.251,7.014 -3.741,18.317
  rectangle: -20.251,40.375 -3.741,57.56
  rectangle: -86.418,47.273 -73.972,57.433
  rectangle: -86.291,7.014 -66.352,24.286
  rectangle: -76.258,15.396 -29.15,40.542
  region: -20.025,47.273 -86.291,47.273 -86.291,40.375 -20.025,40.375
  region: -3.741,40.55 -18.075,40.55 -18.075,18.063 -3.741,18.063
  rectangle: -55.938,47.273 -20.124,49.813
  rectangle: -5.011,9.173 -3.741,18.063
  rectangle: -30.919,15.396 -17.2,24.413
  rectangle: -8.497,59.198 -7.953,61.776
  rectangle: -21.197,59.198 -20.653,61.776
  region: -57.211,47.87 -57.211,48.336 -58.214,48.336 -58.214,47.87
  region: -59.751,47.87 -59.751,48.336 -60.754,48.336 -60.754,47.87
  region: -62.291,47.87 -62.291,48.336 -63.294,48.336 -63.294,47.87
  region: -64.831,47.87 -64.831,48.336 -65.834,48.336 -65.834,47.87
  region: -67.371,47.87 -67.371,48.336 -68.374,48.336 -68.374,47.87
  region: -69.911,47.87 -69.911,48.336 -70.914,48.336 -70.914,47.87
  lines w0.381: -74.265,28.017 -74.265,29.038 ; -74.265,30.557 -74.265,31.578 ; -74.265,33.097 -74.265,34.118 ; -74.265,35.637 -74.265,36.658 ; -74.265,38.177 -74.265,39.198
Mechanical 2:
  lines w0.127: -88.151,28.76 -83.151,28.76 -83.151,36.56 -88.151,36.56 -88.151,28.76

## Dimensions
0,65.31 to 0,0 on Mechanical 13
-88.221,65.31 to 0,65.31 on Mechanical 13